# EAGLE board Laser Monitor (EAGLE 7.6.0)
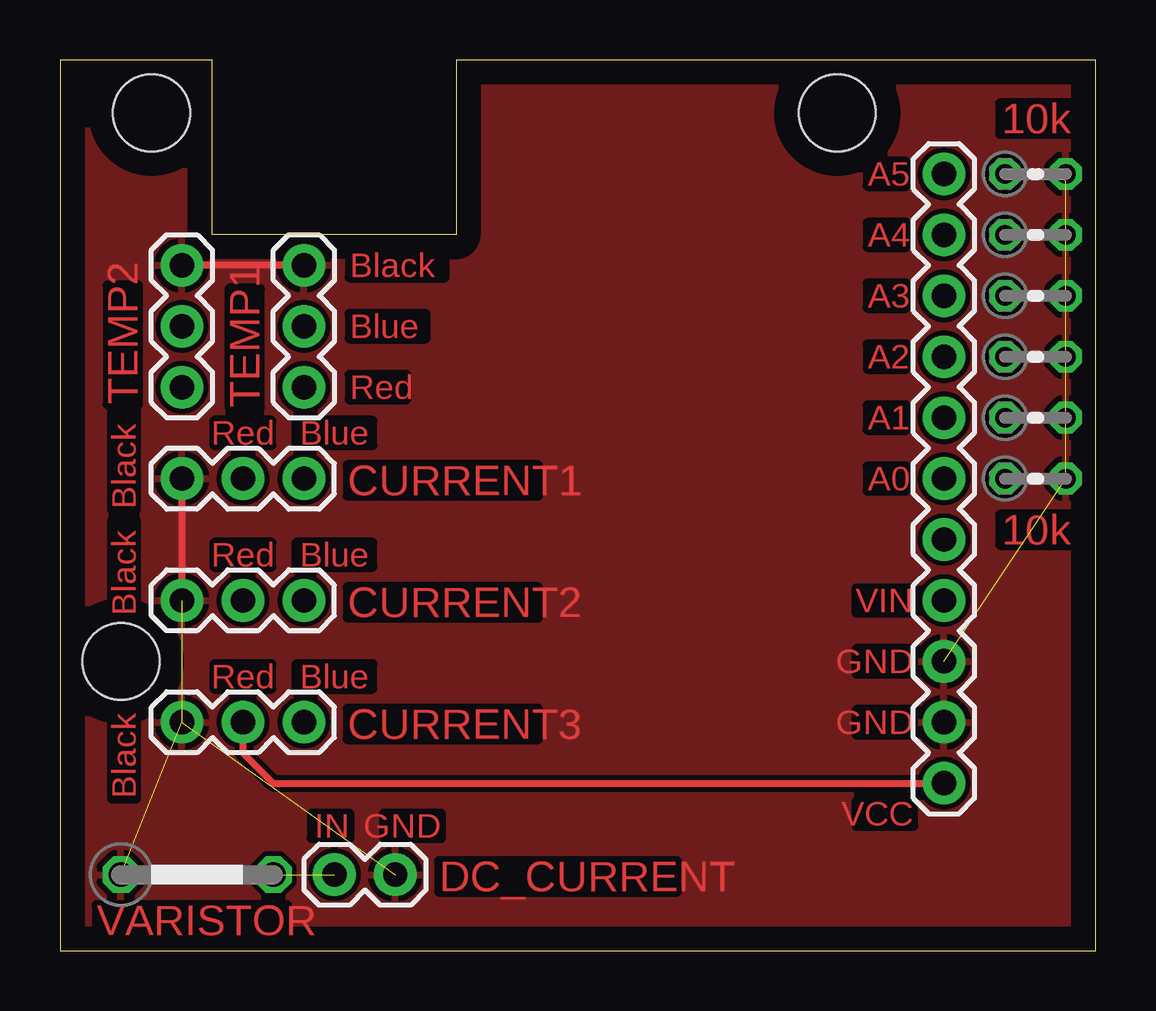
[diagram p0: board, top side]
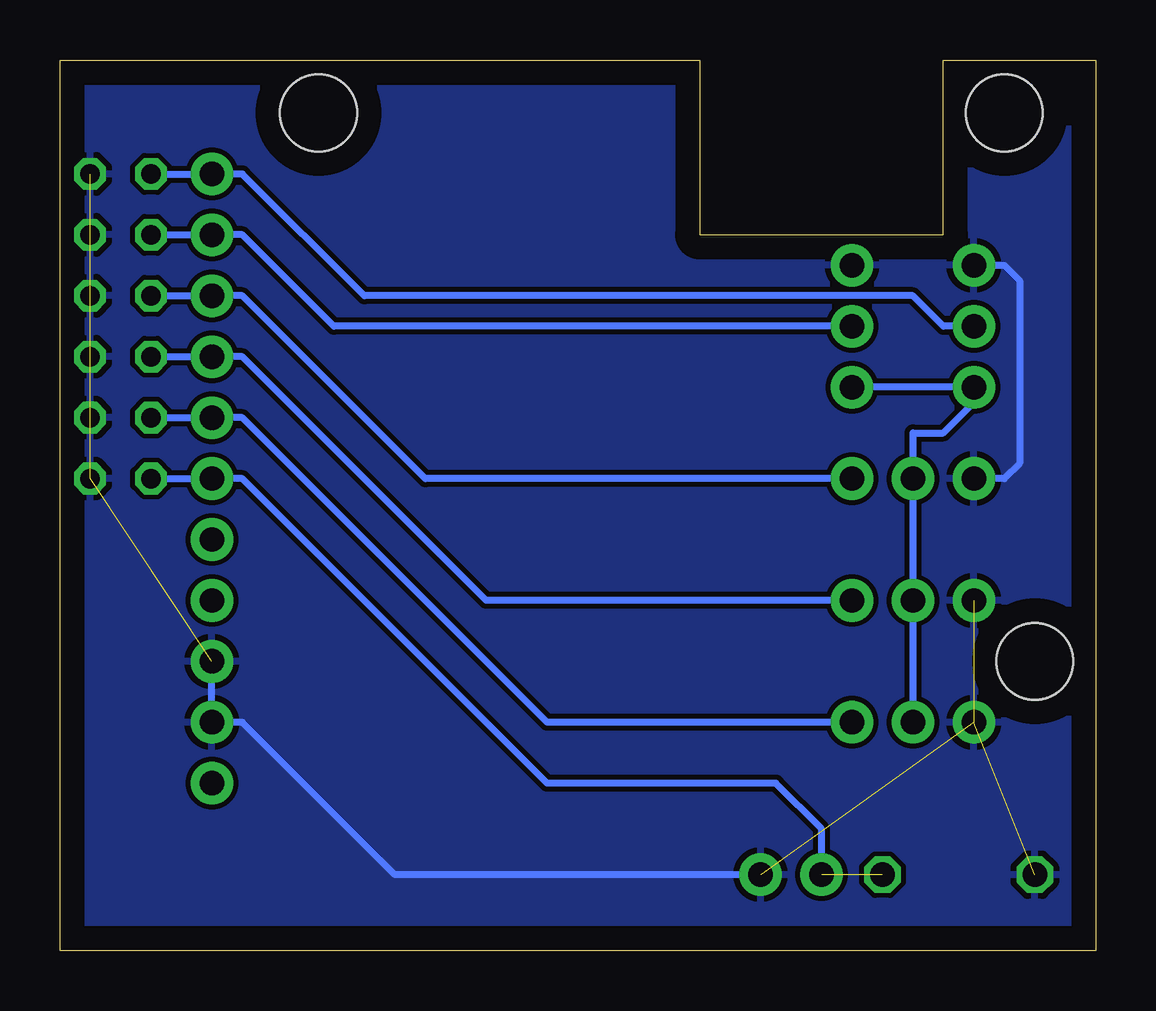
[diagram p1: board, bottom side, seen from below]

Size 43.16 x 37.13 mm. Coordinates in mm from the lower left corner, seen from the top.
Outline: 0,0 43.16,0 43.16,37.13 16.51,37.13 16.51,29.84 6.35,29.84 6.35,37.13 0,37.13 0,0
Copper layers (1*16): Top 0.035mm / dielectric 1.5mm / Bottom 0.035mm
Design rules "default": minimum track width 10mil, minimum drill 24mil, track to track 8mil, track to pad 8mil, pad to pad 8mil, via to via 8mil, smd to smd 8mil, copper to edge 40mil, drill to drill 8mil, minimum pad ring 10mil, minimum via ring 8mil, stop-mask expansion 4mil, vias tented up to drill 0mil, thermal gap 10mil
Holes 3.2 mm at 3.81,34.92 32.38,34.92 2.54,12.06

## Footprints (pad centres in the part's own frame; a part is rotated, then mirrored left to right if it is on the bottom)
1X11 = drill 1.016 pad 1.778: 1 0,0; 2 2.54,0; 3 5.08,0; 4 7.62,0; 5 10.16,0; 6 12.7,0; 7 15.24,0; 8 17.78,0; 9 20.32,0; 10 22.86,0; 11 25.4,0
1X03 = drill 1.016 pad 1.778: 1 0,0; 2 2.54,0; 3 5.08,0
1X02 = drill 1.016 pad 1.778: 1 0,0; 2 2.54,0
0204V = drill 0.813 octagon: 1 -1.27,0; 2 1.27,0
P0817V = drill 1.016 octagon: 1 -5.08,0; 2 1.27,0

## Placement (x,y rotation side)
ARDUINO_UNO  [1X11]  36.83,6.99 90 top
CURRENT1  [1X03]  10.16,19.68 180 top
CURRENT2  [1X03]  10.16,14.61 180 top
CURRENT3  [1X03]  10.16,9.53 180 top
DC_CURRENT  [1X02]  11.43,3.17 0 top
R1  10k  [0204V]  40.64,32.38 0 top
R2  10k  [0204V]  40.64,29.84 0 top
R3  10k  [0204V]  40.64,27.3 0 top
R4  10k  [0204V]  40.64,24.77 0 top
R5  10k  [0204V]  40.64,22.23 0 top
R6  10k  [0204V]  40.64,19.68 0 top
R7  VARISTOR  [P0817V]  7.62,3.17 0 top
TEMP1  [1X03]  10.16,23.5 90 top
TEMP2  [1X03]  5.08,23.5 90 top

## Library data of the parts
ARDUINO_UNO CURRENT1-CURRENT3 DC_CURRENT TEMP1 TEMP2 = SparkFun-Connectors
R1-R7 = resistor

## Nets
A0: ARDUINO_UNO.6 DC_CURRENT.1 R6.1 R7.2
A1: ARDUINO_UNO.7 CURRENT3.1 R5.1
A2: ARDUINO_UNO.8 CURRENT2.1 R4.1
A3: ARDUINO_UNO.9 CURRENT1.1 R3.1
A4: ARDUINO_UNO.10 R2.1 TEMP1.2
A5: ARDUINO_UNO.11 R1.1 TEMP2.2
GND: ARDUINO_UNO.2 ARDUINO_UNO.3 CURRENT1.3 CURRENT2.3 CURRENT3.3 DC_CURRENT.2 R1.2 R2.2 R3.2 R4.2 R5.2 R6.2 R7.1 TEMP1.3 TEMP2.3
VCC: ARDUINO_UNO.1 CURRENT1.2 CURRENT2.2 CURRENT3.2 TEMP1.1 TEMP2.1

## Tracks (layer width: path | path; a pad name or v marks a point on that pad's centre or on a via)
A0  (1 unrouted)
  Bottom 0.3: R6.1 ARDUINO_UNO.6 35.56,19.68 22.86,6.99 13.34,6.99 11.43,5.08 DC_CURRENT.1
A1
  Bottom 0.3: CURRENT3.1 22.86,9.53 35.56,22.23 ARDUINO_UNO.7 R5.1
A2
  Bottom 0.3: CURRENT2.1 25.4,14.61 35.56,24.77 ARDUINO_UNO.8 R4.1
A3
  Bottom 0.3: CURRENT1.1 27.94,19.68 35.56,27.3 ARDUINO_UNO.9 R3.1
A4
  Bottom 0.3: TEMP1.2 31.75,26.04 35.56,29.84 ARDUINO_UNO.10 R2.1
A5
  Bottom 0.3: TEMP2.2 6.35,26.04 7.62,27.3 30.48,27.3 35.56,32.38 ARDUINO_UNO.11 R1.1
GND  (9 unrouted)
  Top 0.3: TEMP1.3 TEMP2.3 | CURRENT1.3 CURRENT2.3
  Bottom 0.3: DC_CURRENT.2 29.21,3.17 35.56,9.53 ARDUINO_UNO.2 ARDUINO_UNO.3 | TEMP2.3 3.81,28.57 3.17,27.94 3.17,20.32 3.81,19.68 CURRENT1.3
  pour Bottom: 0,0 43.18,0 43.18,37.47 0,37.47
  pour Top: 43.18,0 0,0 0,37.47 43.18,37.47
VCC
  Top 0.3: CURRENT3.2 7.62,8.26 8.89,6.99 ARDUINO_UNO.1
  Bottom 0.3: TEMP1.1 TEMP2.1 5.08,22.86 6.35,21.59 7.62,21.59 CURRENT1.2 CURRENT2.2 CURRENT3.2

## Text on the board
Top: A5 | A4 | Black | A3 | Blue | A2 | Red | Red | Blue | A1 | A0 | Black | Red | Blue | VIN | Black | GND | Red | Blue | GND | Black | IN | GND | VCC